# Altium PCB 2009_DFMUX_MEZZANINE_REV4_TIMEMAIL.PCBDOC (part 3 of 6)
Units mil, origin at the board's own origin, x right, y up, seen from the top; angles counter-clockwise.
Board outline 4922.86 x 3627.76 mil, 6 copper layers (Top Layer, Internal Plane 1, Mid-Layer 1, Internal Plane 2, Mid-Layer 2, Bottom Layer); 519 components, 606 nets, 2175 pads, 757 vias.
Unrouted connection lines stored in the file: 148.
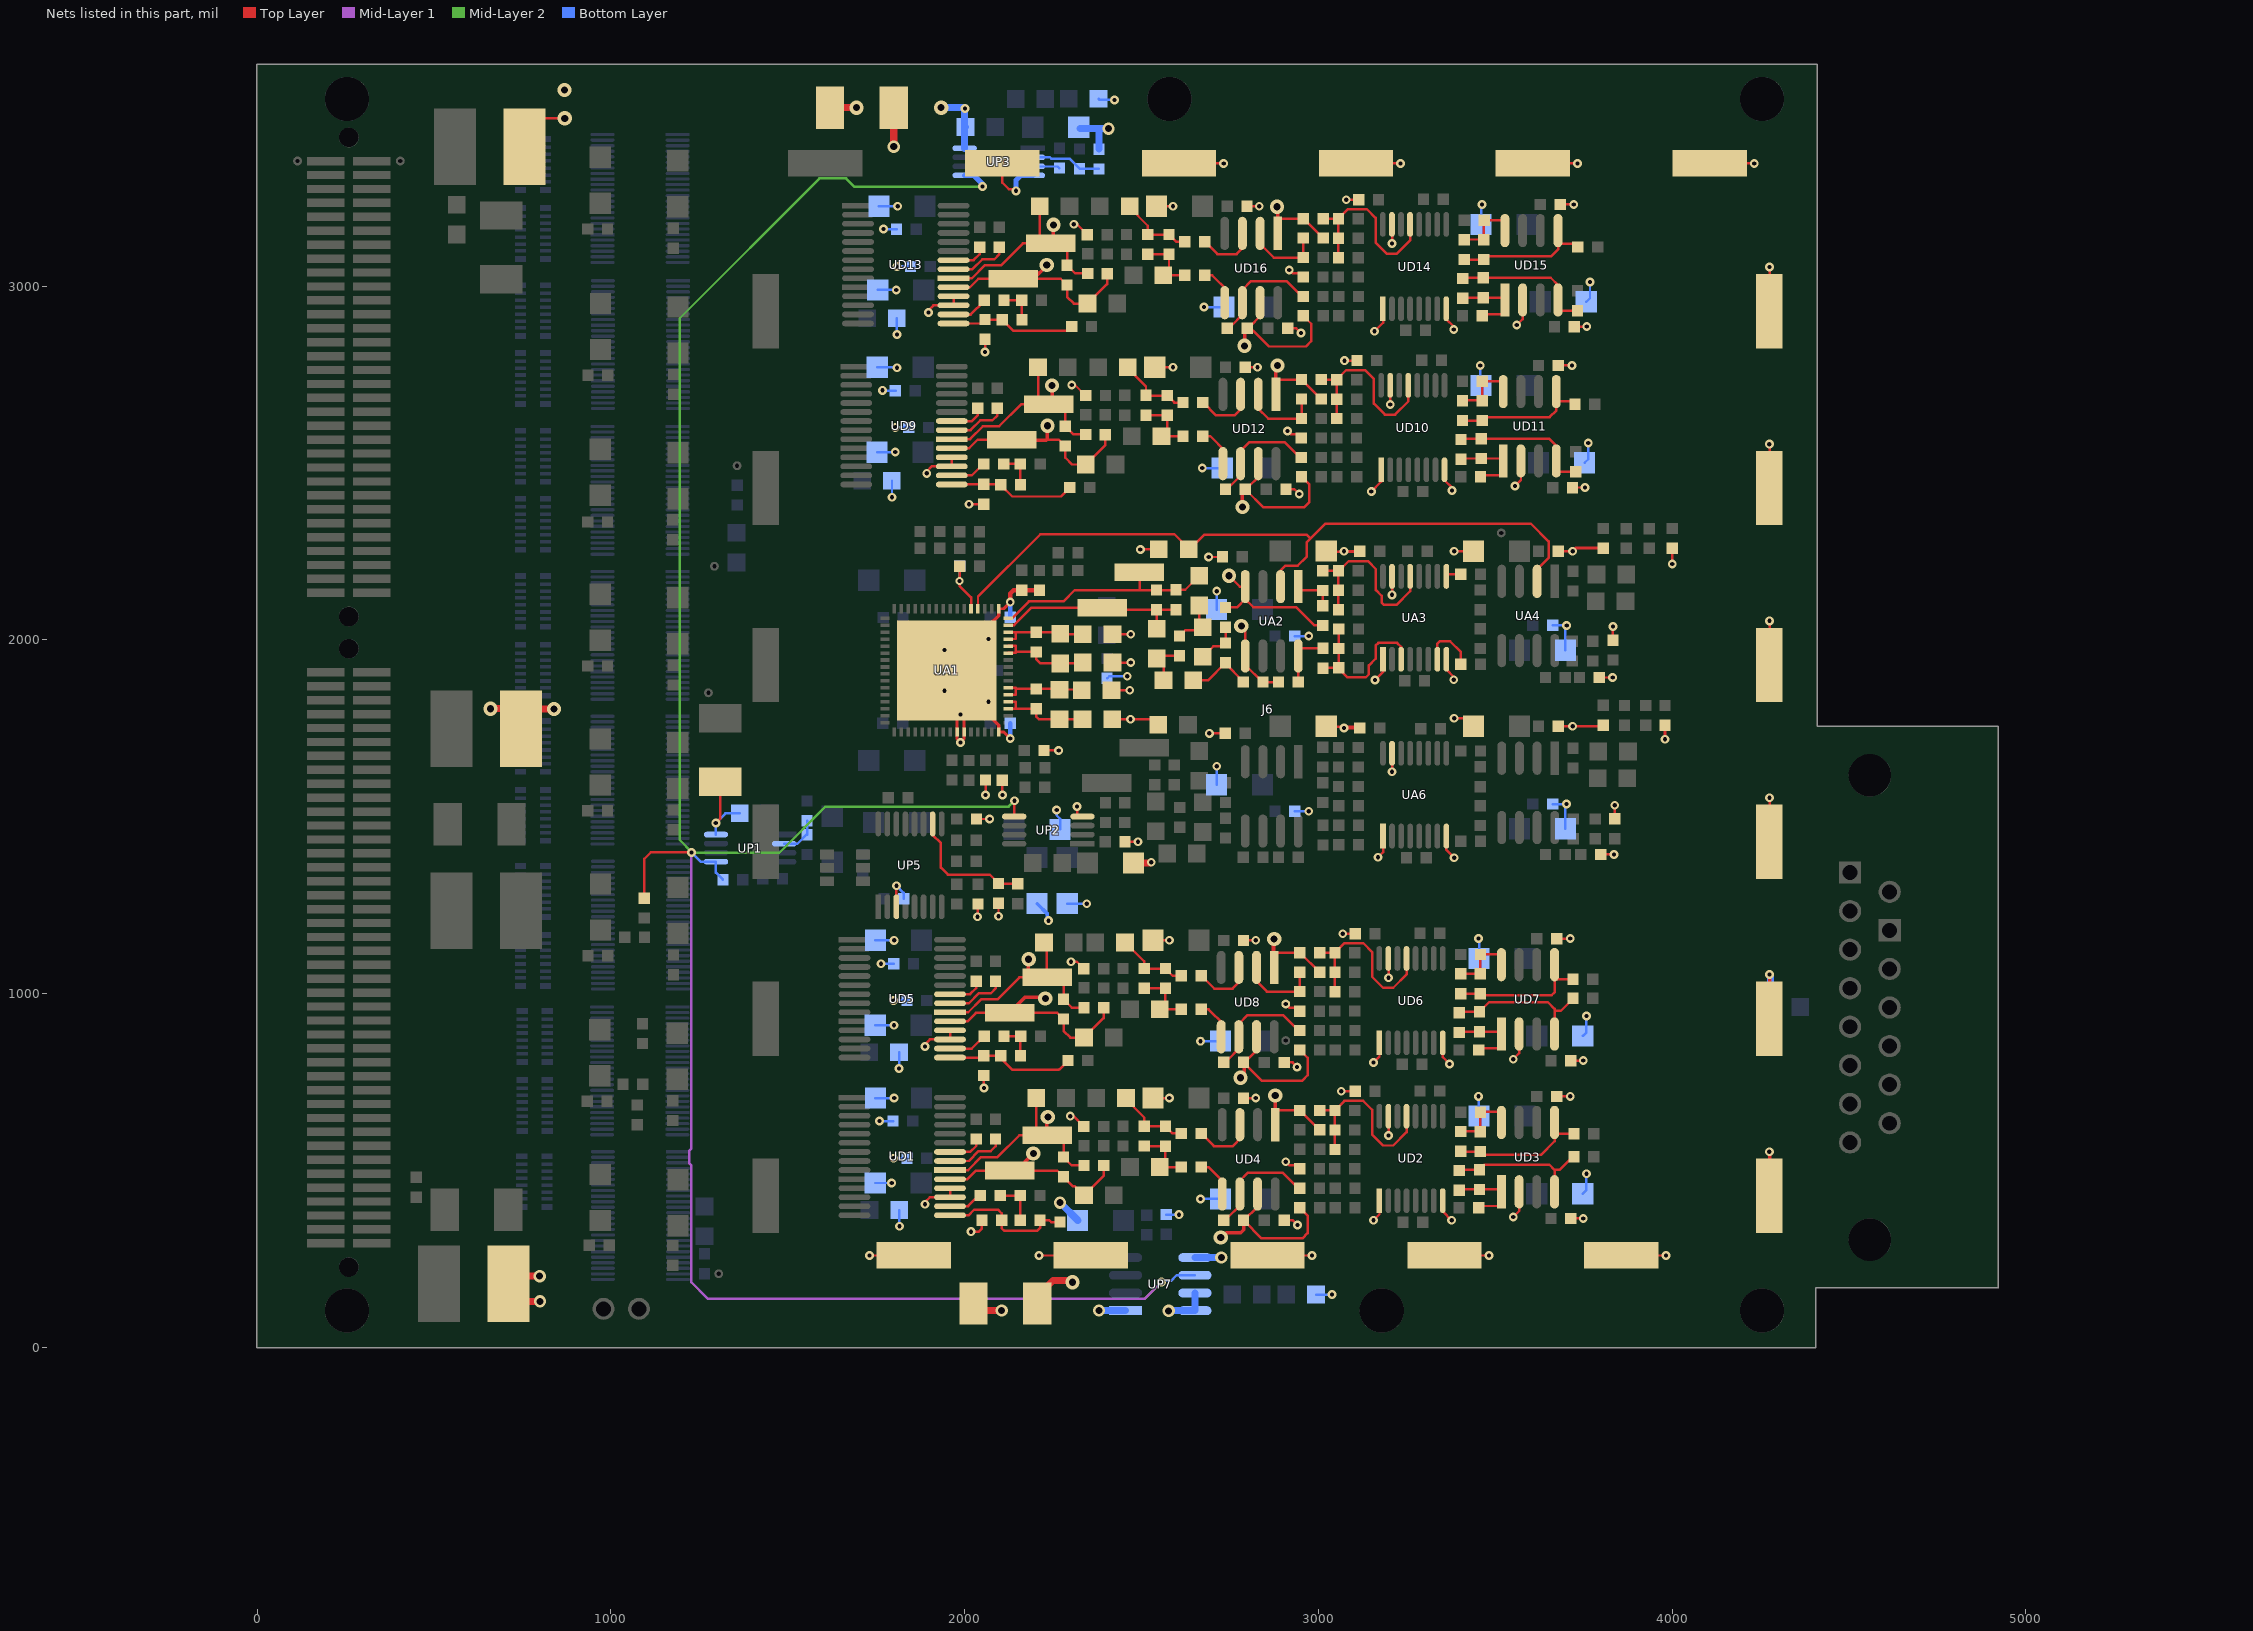
[diagram p7: the nets of this part, all layers, seen from the top]

## Via types
v1: diameter 25, hole 12, Top Layer to Bottom Layer, 692 vias
v2: diameter 40, hole 20, Top Layer to Bottom Layer, 39 vias
v3: diameter 35, hole 20, Top Layer to Bottom Layer, 23 vias
v4: diameter 22, hole 12, Top Layer to Bottom Layer, 3 vias

## Nets (pads, with @x,y where several pads share a name; then routed paths per layer and width w, separated by ;. In a path a pad name is that pad's centre, name@x,y a point inside that pad or via, vN(x,y) a via of type N, cw(c..) or ccw(c..) an arc to the next point about the centre after c; other vN are vias at no path point) (continued)
GND_SIGNAL: CA1.2 CA2.2 CA3.2 CA4.2 CA5.2 CA11.1 CA14.1 CA15.2 CA16.2 CA17.1 CA18.2 CA19.1 CA22.1 CA23.2 CA24.2 CA27.2 CA31.2 CA32.2 CA34.1 CA35.1 CA36.2 CA37.2 CA38.2 CA39.1 CA40.2 CA41.2 CA42.2 CA43.1 CD1.2 CD2.1 CD3.2 CD4.1 CD6.2 CD14.1 CD15.2 CD17.2 CD19.2 CD20.2 CD21.2 CD22.1 CD23.2 CD24.1 CD26.2 CD34.1 CD35.2 CD37.2 CD39.2 CD40.2 CD41.2 CD42.1 CD43.2 CD44.1 CD46.2 CD54.1 CD55.2 CD57.2 CD59.2 CD60.2 CD61.2 CD62.1 CD63.2 CD64.1 CD66.2 CD74.1 CD75.2 CD77.2 CD79.2 CD80.2 CD81.2 CD82.2 CD83.2 CD84.2 CD85.2 CD86.2 CD87.2 CD88.2 CD89.2 CD90.2 CD91.1 CD92.2 CD93.1 CD94.2 CD95.1 CD96.2 CD97.1 CD98.2 CP9.2 CP10.2 CP13.2 CP14.2 CP15.1 CP16.1 CP18.2 CP19.1 CP20.2 CP23.2 CP24.2 CP45.2 CP46.2 J6.1 J6.2 J6.3 J6.4 J6.5 J6.6 J6.7 J6.8 J6.9 J6.10 J6.11 J6.19 J6.20 J6.21 J6.22 J6.23 pad.1@1943.27,1855.87 pad.1@1943.27,1970.87 pad.1@1988.51,1788.64 pad.1@2067.25,1825.06 pad.1@2067.25,2002.22 pad.1@2666.63,865.43 pad.1@2907.63,970.43 pad.1@2939.63,792 RA8.1 RA43.1 RD11.2 RD15.2 RD41.2 RD45.2 RD71.2 RD75.2 RD101.2 RD105.2 RG1.1 RP10.2 RP12.2 RP15.2 RP17.2 RP19.2 RP23.2 RP24.1 RP26.1 RP28.1 RP29.1 RP34.1 RP36.2 RP37.2 RP38.2 RP39.2 RP40.2 RP55.1 RP58.1 UA1.17 UA1.58 UA1.59 UA1.64 UA1.65 UA3.1 UA3.8 UA3.15 UA6.1 UA6.8 UA6.15 UD1.17 UD1.18 UD2.1 UD2.8 UD2.15 UD3.2 UD5.17 UD5.18 UD6.1 UD6.8 UD6.15 UD7.2 UD9.17 UD9.18 UD10.1 UD10.8 UD10.15 UD11.2 UD13.17 UD13.18 UD14.1 UD14.8 UD14.15 UD15.2 UP2.4 UP3.4 UP5.3 UP7.5 | length 15519.3
  Top Layer w7: v1@1731.63,259 v1(1731.13,259.5) J6.11@1856.63,259.5 ; v1(1807.13,1304.87) UP5.3@1807.13,1245.8 ; v1(1887.63,404.43) 1887.83,404.63 1887.83,410.43 1901.63,424.23 1959.03,424.23 UD1.18@1959.03,449.83 ; v1(1887.63,850.43) 1887.83,850.63 1887.83,856.43 1901.63,870.23 ; UD5.18@1959.03,895.83 UD5.17@1959.03,870.23 ; UD9.18@1964.03,2515.83 1964.03,2490.23 1906.63,2490.23 1892.83,2476.43 v1@1892.83,2470.63 ; UD13.18@1969.03,2970.83 UD13.17@1969.03,2945.23 ; UA1.59@1999.48,1740.28 1999.8,1740.6 UA1.59@1999.8,1740.28 ; v1(2012.13,2383) CD57.2@2054.63,2383 ; v1(2017.63,327) 2040.13,327 2048.63,335.5 CD17.2@2048.63,359 ; RP23.2@2033.63,1493.37 v1(2070.63,1493.37) ; v1(2036.63,1217) 2036.63,1222 2037.63,1223 RP28.1@2037.63,1253.37 ; v1(2054.63,733) CD37.2@2054.63,768 ; v1(2057.63,2813.43) CD77.2@2057.63,2849 ; v1(2059.27,1560.87) CA31.2@2059.27,1603.37 ; J6.19@2106.63,3346.5 2106.63,3292 2124.63,3274 v1@2147.63,3274 ; v1(2106.77,1560.87) RA43.1@2106.77,1603.37 ; v1@2297.63,654.43 v1(2298.63,653.43) 2307.63,653.43 2336.63,624.43 RD11.2@2335.63,624.43 ; v1(2302.63,2720.43) 2303.63,2719.43 2312.63,2719.43 2341.63,2690.43 RD71.2@2340.63,2690.43 ; v2(2304.63,184) 2304.63,187 v2@2305.63,188 ; v1@2307.63,3175.43 v1(2308.63,3174.43) 2317.63,3174.43 2346.63,3145.43 RD101.2@2345.63,3145.43 ; v1(2317.63,1529) 2317.63,1505 UP2.4@2321.83,1500.8 ; RD41.2@2335.63,1070.43 2336.63,1070.43 2317.07,1090 ; CD2.1@2532.63,704.43 v1(2578.63,704.43) ; CD22.1@2532.63,1150.43 v1(2578.63,1150.43) ; CA35.1@2547.63,1760.43 2532.63,1775.43 v1(2468.63,1775.43) ; v1(2691.63,1735.43) CA24.2@2736.63,1735.43 ; v1@2731.63,3347 v1(2732.13,3346.5) ; CD40.2@2903.63,805.43 2927.2,805.43 2940.63,792 pad.1@2939.63,792 ; pad.1@2907.63,970.43 2917.63,960.43 RD45.2@2936.63,960.43 ; v1(2912.63,2590.43) 2922.63,2580.43 2941.63,2580.43 RD75.2@2951.63,2570.43 ; v1@2939.63,346 v1(2940.63,346) 2927.2,359.43 ; v1@2944.63,2412 v1(2945.63,2412) 2932.2,2425.43 ; RD15.2@2946.63,504.43 2936.63,514.43 2917.63,514.43 ; RD105.2@2956.63,3025.43 2946.63,3035.43 2927.63,3035.43 ; CA23.2@3022.63,1755.43 3022.63,1754.43 3116.63,1754.43 CD82.2@3116.63,1750.43 ; CA3.2@3022.63,2250.43 3022.63,2249.43 3116.63,2249.43 CD81.2@3116.63,2250.43 ; v1@3063.63,723 v1(3064.63,724) ; v1(3068.63,1169) CD26.2@3103.63,1169 ; v1(3149.63,2419) 3177.63,2447 UD10.1@3177.63,2480.43 ; v1@3158.63,2873 v1(3158.63,2872) 3182.63,2896 UD14.1@3182.63,2935.43 ; v1@3164.2,1881 v1@3168.63,1885.43 ; UA3.1@3182.63,1945.43 3182.63,1909 v1(3159.63,1886) ; v1(3198.22,598.85) UD2.15@3198.22,653.02 ; v1(3203.22,2664.85) UD10.15@3203.22,2719.02 ; v1@3208.05,1627.02 v1(3208.22,1627.02) UA6.15@3208.22,1679.68 ; UA3.15@3208.22,2179.68 v1(3208.22,2127.02) ; v1(3208.22,3119.85) UD14.15@3208.22,3174.02 ; UD2.8@3351.72,414.43 UD2.8@3351.72,383.92 ; UD6.8@3351.72,860.43 3351.72,819.92 v1(3370.63,801) ; UD14.8@3361.72,2935.43 3361.72,2905.87 3382.58,2885 v1(3382.58,2877) ; UA3.8@3361.77,1945.43 3361.77,1915.87 3382.63,1895 v1(3382.63,1887) ; v1(3377.58,2422) 3377.58,2430 UD10.8@3356.72,2450.87 ; v1(3383.63,1384) 3361.77,1405.87 ; v1(3383.63,2250.43) CA36.2@3437.63,2250.43 ; v1@3384.63,1779 v1(3383.63,1778) 3413.63,1778 CA40.2@3437.63,1755.43 ; v1@3481.63,260 v1(3482.13,259.5) ; v1(3550.63,368.43) 3567.63,385.43 UD3.2@3567.63,439.43 ; UD11.2@3572.63,2505.43 3572.63,2451.43 ; UD15.2@3577.63,2960.43 3577.63,2906.43 ; J6.22@3606.63,3346.5 v1(3732.13,3346.5) v1@3731.63,3347 ; CD85.2@3673.63,1155.43 v1(3711.63,1155.43) ; CD89.2@3683.63,3230.43 v1(3721.63,3230.43) ; RP29.1@3793.63,1893.37 v1(3831.63,1893.37) ; RP34.1@3797.63,1393.37 v1(3835.63,1393.37) v1@3834.63,1394.37 ; RP58.1@3805,1759 3801.43,1755.43 v1(3718.63,1755.43) ; CP18.2@3832.63,1999.37 v1(3832.63,2037.37) ; CP20.2@3837.63,1494.37 v1(3837.63,1532.37) ; J6.23@4106.63,3346.5 v1(4232.13,3346.5) v1@4231.63,3347 ; v1(4274.63,553) v1@4275.13,553.5 ; v1@4274.63,1553 v1(4275.13,1553.5) J6.4@4275.13,1428 ; v1@4274.63,2053 v1(4275.13,2053.5) J6.3@4275.13,1928 ; J6.2@4275.13,2428 v1@4275.13,2553.5 ; UP5.3@1807.13,1245.8 1807.63,1245.3 UP5.3@1807.13,1245.8 ; v1@1892.83,2470.63 v1(1892.63,2470.43) v1@1892.83,2470.63 ; v1@1897.83,2925.63 v1(1897.63,2925.43) v1@1897.83,2925.63 ; v1@1897.83,2925.63 1897.83,2931.43 1911.63,2945.23 ; 1901.63,870.23 UD5.17@1959.03,870.23 ; 1901.63,870.23 UD5.17@1959.03,870.23 ; 1911.63,2945.23 UD13.17@1969.03,2945.23 ; 1911.63,2945.23 UD13.17@1969.03,2945.23 ; CA27.2@2224.63,1687.37 v1(2265.63,1687.37) ; CA27.2@2224.63,1687.37 v1(2265.63,1687.37) ; CA27.2@2224.63,1687.37 v1(2265.63,1687.37) ; 2317.07,1090 v1(2300.63,1090) 2317.07,1090 ; UP2.4@2321.83,1500.8 2332.63,1500.8 UP2.4@2321.83,1500.8 ; v1(2468.63,1775.43) 2416.63,1775.43 v1(2468.63,1775.43) ; v1(2732.13,3346.5) 2606.63,3346.5 v1(2732.13,3346.5) ; CD1.2@2788.63,704.43 v1(2822.63,704.43) ; CD1.2@2788.63,704.43 v1(2822.63,704.43) ; CD1.2@2788.63,704.43 v1(2822.63,704.43) ; 2917.63,514.43 v1(2907.63,524.43) 2917.63,514.43 ; 2927.2,359.43 2903.63,359.43 2927.2,359.43 ; 2927.63,3035.43 v1(2917.63,3045.43) 2927.63,3035.43 ; 2932.2,2425.43 2908.63,2425.43 2932.2,2425.43 ; RD45.2@2936.63,960.43 2946.63,950.43 RD45.2@2936.63,960.43 ; 2937.2,2880.43 v1(2950.63,2867) ; 2937.2,2880.43 2913.63,2880.43 2937.2,2880.43 ; v1(2950.63,2867) 2949.63,2867 v1(2950.63,2867) ; v1(2982.13,259.5) 2981.63,260 v1(2982.13,259.5) ; v1(2982.13,259.5) 2856.63,259.5 v1(2982.13,259.5) ; v1(3064.63,724) 3103.63,724 v1(3064.63,724) ; CD82.2@3116.63,1750.43 v1(3072.63,1750.43) CD82.2@3116.63,1750.43 ; CD81.2@3116.63,2250.43 v1(3072.63,2250.43) CD81.2@3116.63,2250.43 ; v1(3159.63,1886) 3154.63,1881 v1(3159.63,1886) ; 3172.63,376 v1(3155.63,359) 3172.63,376 ; 3172.63,376 3172.63,414.43 3172.63,376 ; 3172.63,822 3172.63,860.43 3172.63,822 ; 3172.63,822 v1(3155.63,805) 3172.63,822 ; 3182.63,1399.43 3182.63,1445.43 3182.63,1399.43 ; 3182.63,1399.43 v1(3168.63,1385.43) 3182.63,1399.43 ; v1(3208.22,2127.02) 3208.05,2127.02 v1(3208.22,2127.02) ; v1(3232.13,3346.5) 3231.63,3347 v1(3232.13,3346.5) ; v1(3232.13,3346.5) 3106.63,3346.5 v1(3232.13,3346.5) ; UD2.8@3351.72,383.92 v1(3376.63,359) UD2.8@3351.72,383.92 ; UD10.8@3356.72,2450.87 3356.72,2480.43 UD10.8@3356.72,2450.87 ; 3361.77,1405.87 3361.77,1445.43 3361.77,1405.87 ; v1(3482.13,259.5) 3356.63,259.5 v1(3482.13,259.5) ; 3567.63,831.43 v1(3550.63,814.43) 3567.63,831.43 ; 3567.63,831.43 3567.63,885.43 3567.63,831.43 ; 3572.63,2451.43 v1(3555.63,2434.43) 3572.63,2451.43 ; 3577.63,2906.43 v1(3560.63,2889.43) 3577.63,2906.43 ; v1(3718.63,1755.43) 3678.63,1755.43 v1(3718.63,1755.43) ; v1(3831.63,1893.37) 3830.63,1894.37 v1(3831.63,1893.37) ; v1(3832.63,2037.37) 3831.63,2036.37 v1(3832.63,2037.37) ; v1(3837.63,1532.37) 3836.63,1531.37 v1(3837.63,1532.37) ; v1(3982.13,259.5) 3981.63,260 v1(3982.13,259.5) ; v1(3982.13,259.5) 3856.63,259.5 v1(3982.13,259.5) ; v1@4275.13,2553.5 v1(4274.63,2553) v1@4275.13,2553.5 ; v1(4275.13,3053.5) 4274.63,3053 v1(4275.13,3053.5) ; v1(4275.13,3053.5) 4275.13,2928 v1(4275.13,3053.5) ; v1(2095.63,1218.37) 2095.63,1255.37 v1(2095.63,1218.37) ; v1(2210.13,259.5) 2356.63,259.5 v1(2210.13,259.5) ; CA19.1@2414.63,1857.43 v1(2466.63,1857.43) CA19.1@2414.63,1857.43 ; CA14.1@2417.63,1935.43 v1(2469.63,1935.43) CA14.1@2417.63,1935.43 ; CA11.1@2417.63,2015.43 v1(2469.63,2015.43) CA11.1@2417.63,2015.43 ; RP10.2@2453.63,1429 v1(2489.63,1429) RP10.2@2453.63,1429 ; v1(2496.63,2255.43) 2548.63,2255.43 v1(2496.63,2255.43) ; v1@2525.63,1369 v1(2527.63,1371) v1@2525.63,1369 ; CD42.1@2537.63,2770.43 v1(2588.63,2770.43) CD42.1@2537.63,2770.43 ; CD62.1@2542.63,3225.43 v1(2588.63,3225.43) CD62.1@2542.63,3225.43 ; v1(2689.63,2234) 2728.63,2234 v1(2689.63,2234) ; CD21.2@2788.63,1150.43 v1(2822.63,1150.43) CD21.2@2788.63,1150.43 ; CD41.2@2793.63,2770.43 v1(2827.63,2770.43) CD41.2@2793.63,2770.43 ; CD61.2@2798.63,3225.43 v1(2832.63,3225.43) CD61.2@2798.63,3225.43 ; v1(3073.63,2789) 3108.63,2789 v1(3073.63,2789) ; v1(3078.63,3244) 3113.63,3244 v1(3078.63,3244) ; v1(3198.22,1044.85) 3198.22,1099.02 v1(3198.22,1044.85) ; CD83.2@3673.63,709.43 v1(3711.63,709.43) CD83.2@3673.63,709.43 ; CA37.2@3678.63,2250.43 v1(3718.63,2250.43) CA37.2@3678.63,2250.43 ; CD87.2@3678.63,2775.43 v1(3716.63,2775.43) CD87.2@3678.63,2775.43 ; CD84.2@3713.63,364.43 v1(3748.63,364.43) CD84.2@3713.63,364.43 ; CD86.2@3713.63,810.43 v1(3748.63,810.43) CD86.2@3713.63,810.43 ; CD88.2@3718.63,2430.43 v1(3753.63,2430.43) CD88.2@3718.63,2430.43 ; CD90.2@3723.63,2885.43 v1(3758.63,2885.43) CD90.2@3723.63,2885.43 ; v1@4274.63,1053 v1(4275.13,1053.5) v1@4274.63,1053
  Top Layer w8: UA1.65@1978.66,1787.76 1978.66,1739.43 1978.66,1719.74 v1(1988.51,1709.9) 1998.35,1719.74 1998.35,1739.43 UA1.65@1998.35,1786.79 ; UA1.64@2096.77,1739.43 2110.45,1739.43 v1(2129,1720.87) ; UA1.17@2096.77,2087.85 2110.45,2087.85 v1(2129,2106.41) ; v1(3718.63,2250.43) 3727.2,2259 RP55.1@3805,2259 ; v1(3980,1719) 3980,1758 v1(3980,1719) ; v1(4000,2214) 4000,2258 v1(4000,2214)
  Top Layer w10: UA1.65@2071.77,2043.37 2096.77,2068.37 UA1.17@2096.77,2087.85 ; UA1.65@2074.27,1780.87 2096.77,1758.36 UA1.64@2096.77,1739.43 ; v1(2145,3269) v1@2147.63,3274 ; J6.6@4275.13,428 4275.13,553.5 J6.6@4275.13,428 ; J6.5@4275.13,928 v1(4275.13,1053.5) J6.5@4275.13,928
  Top Layer w12: v1(2129,2106.41) 2129,2130.6 2138.27,2139.87 2161.77,2139.87 RA8.1@2211.77,2139.87
  Top Layer w20: v3(1799.63,3394) CP13.2@1799.63,3504 ; CP15.1@2204.63,124 2204.63,143.63 2250,189 2304.63,189 v2@2305.63,188 ; CP10.2@2477.63,1369 v1@2525.63,1369 ; CP10.2@2477.63,1369 v1@2525.63,1369 ; CP10.2@2477.63,1369 v1@2525.63,1369
  Bottom Layer w7: CD34.1@1747.63,910.43 v1(1800.57,910.43) ; v1@1760.63,640.37 v1(1759.63,639.37) CD4.1@1797.63,639.37 ; v1(1763.63,1084) CD24.1@1799.63,1084 ; v1(1794.63,2403) RP37.2@1794.63,2449 ; v1(1798.63,534.43) CD15.2@1836.63,534.43 ; v1(1798.63,980.43) CD35.2@1836.63,980.43 ; v1(1800.63,1150.37) v1@1800.57,1150.43 ; v1@1801.07,704 v1(1800.63,704.43) ; v1(1803.63,2600.43) CD55.2@1841.63,2600.43 ; CD44.1@1804.63,2704 v1@1766.63,2704 ; v1(1807.13,1304.87) 1827.63,1284.37 CP19.1@1827.63,1268.37 ; v1(1808.63,3055.43) CD75.2@1846.63,3055.43 ; v1(1810.63,3225.37) v1@1810.57,3225.43 ; v1(1814.63,788) RP39.2@1814.63,834 ; CP23.2@2270,1464 2270,1494 2260,1504 ; CP24.2@2290,1254 v1(2345,1254) ; CP14.2@2322.63,3449 CP14.2@2326.63,3445 ; RP17.2@2378.63,3529 2381.63,3526 v1(2423.63,3526) ; v1(2666.63,419.43) CD19.2@2722.63,419.43 ; pad.1@2666.63,865.43 CD39.2@2722.63,865.43 ; v1(2671.63,2485.43) CD59.2@2727.63,2485.43 ; CA34.1@2712.63,1590.43 v1(2712.63,1642.43) ; CA17.1@2712.63,2085.43 v1(2712.63,2137.43) ; CA32.2@2933.63,1515.43 v1(2972.63,1515.43) ; CA16.2@2933.63,2010.43 v1(2972.63,2010.43) ; RP19.2@2993.63,149 v1(3038.63,149) ; v1(3452.63,709.43) 3452.63,656 CD91.1@3454.63,654 ; v1(3452.63,1155.43) 3454.63,1153.43 CD93.1@3454.63,1099 ; CD95.1@3457.63,2721 v1(3457.63,2775.43) ; CD95.1@3459.63,2719 CD95.1@3461.63,2717 ; CD97.1@3459.63,3174 3459.63,3227.43 v1(3462.63,3230.43) ; CA38.2@3662.63,2040.43 3693.63,2040.43 v1@3697.63,2036.43 ; CA43.1@3697.63,1465.43 3697.63,1531.43 v1@3701.63,1535.43 ; CA39.1@3697.63,1970.43 v1@3697.63,2036.43 ; CD92.2@3747.63,434.43 3757.63,444.43 v1(3757.63,490.43) ; CD96.2@3752.63,2500.43 3762.63,2510.43 v1(3762.63,2556.43) ; v1(4274.63,553) v1@4278,556.37 ; v1@4274.63,1053 4271,1053 v1@4278,1046 ; v1@4275,1054 v1@4278,1051 ; v1@1766.63,2704 v1(1767.63,2705) v1@1766.63,2704 ; v1@1769.63,3160.37 v1(1770.63,3161.37) v1@1769.63,3160.37 ; v1@1769.63,3160.37 1807.63,3160.37 v1@1769.63,3160.37 ; v1(1800.57,910.43) 1800.63,910.37 v1(1800.57,910.43) ; v1@1800.57,1150.43 1747.63,1150.43 v1@1800.57,1150.43 ; v1(1800.63,704.43) 1747.63,704.43 v1(1800.63,704.43) ; v1@1806.2,2989 v1(1806.63,2988.57) v1@1806.2,2989 ; v1@1806.2,2989 1754.63,2989 v1@1806.2,2989 ; v1@1807.2,2770.43 v1(1808.63,2769) v1@1807.2,2770.43 ; v1@1807.2,2770.43 1752.63,2770.43 v1@1807.2,2770.43 ; v1@1810.57,3225.43 1757.63,3225.43 v1@1810.57,3225.43 ; 2260,1504 v1(2260,1519) 2260,1504 ; RP12.2@2408.63,1897 v1(2459.63,1897) RP12.2@2408.63,1897 ; RP12.2@2408.63,1897 2402.63,1891 RP12.2@2408.63,1897 ; v1@3697.63,2036.43 v1(3701.63,2040.43) v1@3697.63,2036.43 ; v1@3701.63,1535.43 3662.63,1535.43 v1@3701.63,1535.43 ; CD94.2@3757.63,890.43 v1(3757.63,936.43) CD94.2@3757.63,890.43 ; CD94.2@3757.63,890.43 3747.63,880.43 CD94.2@3757.63,890.43 ; CD98.2@3767.63,2965.43 v1(3767.63,3011.43) CD98.2@3767.63,2965.43 ; CD98.2@3767.63,2965.43 3757.63,2955.43 CD98.2@3767.63,2965.43 ; CD14.1@1747.63,464.43 v1(1793.63,464.43) CD14.1@1747.63,464.43 ; CD54.1@1752.63,2530.43 v1(1803.63,2530.43) CD54.1@1752.63,2530.43 ; v1(1808.63,2863) 1808.63,2909 v1(1808.63,2863) ; v1(1815.63,342) 1815.63,388 v1(1815.63,342) ; RP24.1@2569.63,375 v1(2605.63,375) RP24.1@2569.63,375 ; v1(2676.63,2940.43) 2732.63,2940.43 v1(2676.63,2940.43)
  Bottom Layer w10: v1(2237,1206) 2234,1203 CP9.2@2234,1225 ; v1@4274.63,1053 4274.63,1053.63 v1@4275,1054 ; CP9.2@2234,1225 2205,1254 CP9.2@2234,1225
  Bottom Layer w12: v1(2129,1720.87) CA18.2@2129,1763.91 ; CA4.2@2129,2063.37 v1(2129,2106.41)
  Bottom Layer w15: 2145,3299 v1(2145,3269) 2145,3299 ; 2145,3299 2158.2,3312.2 ; 2158.2,3312.2 2192.63,3312.2 2158.2,3312.2
  Bottom Layer w20: pad.1@1943.27,1855.87 RP38.2@1943.27,1913.37 ; pad.1@1943.27,1970.87 RP38.2@1943.27,1913.37 ; CA15.2@2035.77,1913.37 RP38.2@1943.27,1913.37 ; CP14.2@2326.63,3445 2379.63,3445 ; v3(2406.63,3445) 2379.63,3445 ; UP7.5@2650.63,254 v3(2725.63,254) ; v1@4278,1051 v1@4278,1046 ; 2379.63,3445 2379.63,3387 2379.63,3445 ; v1@4278,1046 4278,962 v1@4278,1046 ; v3(2269.63,409) 2319.63,359 v3(2269.63,409)
  other v1: 3701.13,1535.43
N02025: CD68.2 UD13.22 | length 99.7
  Top Layer w7: UD13.22@1969.03,3073.23 2025.43,3073.23 2042.63,3090.43 CD68.2@2042.63,3109.43
N02025_5443: CD48.2 UD9.22 | length 99.7
  Top Layer w7: UD9.22@1964.03,2618.23 2020.43,2618.23 2037.63,2635.43 CD48.2@2037.63,2654.43
N02025_5891: CD28.2 UD5.22 | length 99.7
  Top Layer w7: UD5.22@1959.03,998.23 2015.43,998.23 2032.63,1015.43 CD28.2@2032.63,1034.43
N02025_6339: CD8.2 UD1.22 | length 99.7
  Top Layer w7: UD1.22@1959.03,552.23 2015.43,552.23 2032.63,569.43 CD8.2@2032.63,588.43
N02076: CD9.2 UD1.21 | length 165.9
  Top Layer w7: UD1.21@1959.03,526.63 2011.83,526.63 2039.63,554.43 2073.63,554.43 2087.63,568.43 CD9.2@2087.63,588.43
N02076_2990: CD69.2 UD13.21 | length 165.9
  Top Layer w7: UD13.21@1969.03,3047.63 2021.83,3047.63 2049.63,3075.43 2083.63,3075.43 2097.63,3089.43 CD69.2@2097.63,3109.43
N02076_5385: CD49.2 UD9.21 | length 165.9
  Top Layer w7: UD9.21@1964.03,2592.63 2016.83,2592.63 2044.63,2620.43 2078.63,2620.43 2092.63,2634.43 CD49.2@2092.63,2654.43
N02076_5833: CD29.2 UD5.21 | length 165.9
  Top Layer w7: UD5.21@1959.03,972.63 2011.83,972.63 2039.63,1000.43 2073.63,1000.43 2087.63,1014.43 CD29.2@2087.63,1034.43
N03097: CD77.1 RD118.2 RD120.1 UD13.15 | length 355.7
  Top Layer w7: UD13.15@1969.03,2894.03 2046.67,2894.03 2057.63,2905 2105.63,2905 2136.63,2874 2291.2,2874 RD120.1@2302.63,2885.43
N03097_5373: CD57.1 RD88.2 RD90.1 UD9.15 | length 358.2
  Top Layer w7: UD9.15@1964.07,2439 2054.63,2439 2100.63,2439 2101.63,2438 2134.63,2405 2272.2,2405 RD90.1@2297.63,2430.43
N03097_5821: CD37.1 RD58.2 RD60.1 UD5.15 | length 369.6
  Top Layer w7: UD5.15@1959.03,819.03 1962.63,815.43 1965.2,818 2048.63,818 2054.63,824 2101.63,824 2101.63,818 2135.63,784 2266.07,784 2267.63,785.43 RD60.1@2292.63,810.43
N03097_6269: CD17.1 RD28.2 RD30.1 UD1.15 | length 394.1
  Top Layer w7: UD1.15@1959.03,373.03 2011.17,373.03 2027.13,389 2094.63,389 2104.63,379 2104.63,359 2104.63,336.5 2112.13,329 2204.63,329 2213.13,337.5 2213.13,359 2239.63,359 2244.63,354 RD30.1@2269.63,354
N04051: RD2SET4.1 UD13.16 | length 105.6
  Top Layer w7: UD13.16@1969.03,2919.63 1970.03,2918.43 1970.6,2919 2016.63,2919 2055.63,2958 RD2SET4.1@2055.63,2960
N04051_5452: RD2SET3.1 UD9.16 | length 104
  Top Layer w7: UD9.16@1964.03,2464.63 1964.4,2465 2020.63,2465 2052.63,2497 RD2SET3.1@2054.63,2497
N04051_5900: RD2SET2.1 UD5.16 | length 111.9
  Top Layer w7: UD5.16@1959.03,844.63 1960.03,843.43 1960.6,844 2019.63,844 2054.63,879 RD2SET2.1@2055.63,879
N04051_6348: RD2SET1.1 UD1.16 | length 104
  Top Layer w7: UD1.16@1959.03,398.63 1959.4,399 2009.63,399 2029.63,419 2044.63,419 RD2SET1.1@2044.63,429
N04200: RD2SET4.2 RD110.1 RD118.1 | length 105
  Top Layer w7: RD2SET4.2@2111.63,2960 2161.63,2960 RD118.1@2161.63,2905
N04200_5371: RD2SET3.2 RD80.1 RD88.1 | length 107
  Top Layer w7: RD2SET3.2@2109.63,2497 2110.63,2497 2157.63,2497 RD88.1@2157.63,2438
N04200_5819: RD2SET2.2 RD50.1 RD58.1 | length 103.4
  Top Layer w7: RD2SET2.2@2110.63,879 2111.63,879 2158.63,879 2157.63,878 RD58.1@2157.63,824
N04200_6267: RD2SET1.2 RD20.1 RD28.1 | length 126.5
  Top Layer w7: RD2SET1.2@2100.63,429 2157.13,429 RD28.1@2157.13,359
N07701: CD70.1 JD4.2 LD13.1 RD100.1 UD13.20 | length 655.6
  Top Layer w7: UD13.20@1969.03,3022.03 2020.23,3022.03 2056.63,3058.43 2102.63,3058.43 2164.63,3120.43 JD4.2@2221.63,3120.43 ; LD13.1@2212.63,3225.43 2212.63,3129.43 JD4.2@2221.63,3120.43 ; RD100.1@2347.63,3035.43 2312.63,3035.43 2289.63,3058.43 2289.63,3120.43 2242.63,3120.43 JD4.2@2221.63,3120.43
  Top Layer w10: JD4.2@2242.63,3120.43 2251,3128.8 v2(2251,3173)
N07701_5419: CD50.1 JD3.2 LD9.1 RD70.1 UD9.20 | length 662.2
  Top Layer w7: UD9.20@1964.03,2567.03 2015.23,2567.03 2051.63,2603.43 2097.63,2603.43 2159.63,2665.43 JD3.2@2216.63,2665.43 ; LD9.1@2207.63,2770.43 2207.63,2674.43 JD3.2@2216.63,2665.43 ; JD3.2@2237.63,2665.43 JD3.2@2216.63,2665.43 ; JD3.2@2246.43,2665.43 2284.63,2665.43 2284.63,2603.43 2307.63,2580.43 RD70.1@2342.63,2580.43
  Top Layer w10: v2(2247,2719) 2247,2666 JD3.2@2246.43,2665.43 ; JD3.2@2246.43,2665.43 2237.63,2665.43 JD3.2@2246.43,2665.43
N07701_5867: CD30.1 JD2.2 LD5.1 RD40.1 UD5.20 | length 654.5
  Top Layer w7: UD5.20@1959.03,947.03 2010.23,947.03 2046.63,983.43 2092.63,983.43 2154.63,1045.43 JD2.2@2203.57,1045.43 ; LD5.1@2224.63,1144 2232.63,1136 2232.63,1045.43 2279.63,1045.43 2279.63,983.43 2302.63,960.43 RD40.1@2337.63,960.43
  Top Layer w10: v2(2181,1097) 2180,1096 2180,1069 2203.57,1045.43 JD2.2@2232.63,1045.43
N07701_6315: CD10.1 JD1.2 LD1.1 RD10.1 UD1.20 | length 652.2
  Top Layer w7: UD1.20@1959.03,501.03 2010.23,501.03 2046.63,537.43 2092.63,537.43 2154.63,599.43 JD1.2@2211.63,599.43 ; LD1.1@2202.63,704.43 2202.63,608.43 JD1.2@2211.63,599.43 ; RD10.1@2337.63,514.43 2302.63,514.43 2279.63,537.43 2279.63,599.43 2232.63,599.43 JD1.2@2211.63,599.43
  Top Layer w10: JD1.2@2232.63,599.43 2232.63,648.63 v2(2235,651)
N07959: CD10.2 JD1.1 LD3.1 RD16.2 UD1.19 | length 618.4
  Top Layer w7: UD1.19@1959.03,475.43 2007.63,475.43 2031.63,499.43 JD1.1@2127.63,499.43 ; RD16.2@2392.63,513.43 2392.63,484.43 2337.63,429.43 2311.63,455 2306.2,455 2279.63,481.1 2279.63,481.43 2261.63,499.43 JD1.1@2145.43,499.43 ; JD1.1@2127.63,499.43 JD1.1@2145.43,499.43 ; JD1.1@2127.63,499.43 JD1.1@2145.43,499.43
  Top Layer w10: JD1.1@2140,494 2145.43,499.43 v2(2194,548)
N07959_3010: CD70.2 JD4.1 LD15.1 RD106.2 UD13.19 | length 599.2
  Top Layer w7: UD13.19@1969.03,2996.43 2015.07,2996.43 2039.07,3020.43 2137.63,3020.43 2194.43,3020.43 2271.63,3020.43 2289.63,3002.43 2289.63,2969.43 2308.63,2950.43 2347.63,2950.43 2402.63,3005.43 RD106.2@2402.63,3034.43
  Top Layer w10: JD4.1@2194.43,3020.43 2233,3059 v2(2232,3059)
N07959_5408: CD50.2 JD3.1 LD11.1 RD76.2 UD9.19 | length 735.1
  Top Layer w7: UD9.19@1964.03,2541.43 2012.63,2541.43 2036.63,2565.43 JD3.1@2132.63,2565.43 ; RD76.2@2397.63,2579.43 2397.63,2550.43 2342.63,2495.43 2303.63,2495.43 2284.63,2514.43 2284.63,2547.43 2266.63,2565.43 2231.43,2565.43 ; JD3.1@2132.63,2565.43 2231.43,2565.43 ; JD3.1@2132.63,2565.43 2231.43,2565.43
  Top Layer w10: JD3.1@2180,2564 2230,2564 2231.43,2565.43 2234,2568 v2(2234,2605)
N07959_5856: CD30.2 JD2.1 LD7.1 RD46.2 UD5.19 | length 664
  Top Layer w7: UD5.19@1959.03,921.43 2007.63,921.43 2031.63,945.43 2127.63,945.43 2261.63,945.43 2279.63,927.43 2279.63,894.43 2298.63,875.43 2337.63,875.43 2392.63,930.43 RD46.2@2392.63,959.43
  Top Layer w10: JD2.1@2127.63,945.43 2127.63,946.63 2170,989 2225,989 v2(2228,986)
N08417: CD11.1 LD2.2 RD9.1 RD14.1 | length 214.4
  Top Layer w7: LD2.2@2456.63,704.43 2456.63,700.43 2507.63,649.43 2507.63,624.43 2567.63,624.43 2587.63,604.43 RD9.1@2612.63,604.43
N08417_3009: CD71.1 LD14.2 RD99.1 RD104.1 | length 214.4
  Top Layer w7: LD14.2@2466.63,3225.43 2466.63,3221.43 2517.63,3170.43 2517.63,3145.43 2577.63,3145.43 2597.63,3125.43 RD99.1@2622.63,3125.43
N08417_5407: CD51.1 LD10.2 RD69.1 RD74.1 | length 214.4
  Top Layer w7: LD10.2@2461.63,2770.43 2461.63,2766.43 2512.63,2715.43 2512.63,2690.43 2572.63,2690.43 2592.63,2670.43 RD69.1@2617.63,2670.43
N08417_5855: CD31.1 LD6.2 RD39.1 RD44.1 | length 222.1
  Top Layer w7: LD6.2@2453.63,1144 2453.63,1147.43 2456.63,1150.43 2456.63,1142 2507.63,1091 2507.63,1070.43 2567.63,1070.43 2587.63,1050.43 RD39.1@2612.63,1050.43
N08612: CA8.1 LA2.2 RA19.1 | length 126.2
  Top Layer w7: LA2.2@2672.63,1951.43 2702.63,1981.43 2728.63,1981.43 2737.63,1990.43 RA19.1@2737.63,2035.43
N08712: CA8.2 LA4.2 RA21.1 | length 186
  Top Layer w7: LA4.2@2646.63,1885.43 2687.63,1885.43 2736.63,1934.43 2737.63,1934.43 2737.63,1932.43 2787.63,1882.43 RA21.1@2787.63,1880.43
N08812: CA10.2 LA3.2 LA4.1 | length 137.6
  Top Layer w7: LA4.1@2562.63,1885.43 2562.63,1926.43 2542.63,1946.43 2550.63,1954.43 CA10.2@2607.63,1954.43
N09123: CA10.1 LA1.2 LA2.1 | length 140.5
  Top Layer w7: CA10.1@2607.63,2010.43 2623.63,2026.43 2663.63,2026.43 2672.63,2035.43 2662.63,2045.43 LA1.2@2662.63,2096.43
N09233: CA9.2 JA1.2 LA3.1 RA20.1 UA1.15 | length 550.1
  Top Layer w7: UA1.15@2123.35,2041.59 2139.99,2041.59 2189.27,2090.87 2389.27,2090.87 2408.63,2084.43 CA9.2@2542.63,2084.43 ; LA3.1@2542.63,2030.43 CA9.2@2542.63,2084.43 ; RA20.1@2597.63,2085.43 2596.63,2084.43 CA9.2@2542.63,2084.43
N09341: CA9.1 JA1.1 LA1.1 RA20.2 UA1.16 | length 639.1
  Top Layer w7: UA1.16@2123.35,2061.28 2134.68,2061.28 2181.77,2108.37 2279.27,2108.37 2311.34,2140.43 2494.27,2140.43 ; JA1.1@2494.27,2190.87 2494.27,2140.43 ; LA1.1@2662.63,2180.43 2623.63,2141.43 2597.63,2141.43 2596.63,2140.43 2542.63,2140.43 2494.27,2140.43
N09563: CD71.2 LD16.2 RD104.2 RD109.1 | length 186.6
  Top Layer w7: CD71.2@2517.63,3089.43 2577.63,3089.43 LD16.2@2577.63,3046.43 ; LD16.2@2561.63,3030.43 LD16.2@2577.63,3046.43 ; RD109.1@2622.63,3030.43 2577.63,3030.43 LD16.2@2577.63,3046.43
N09563_5444: CD51.2 LD12.2 RD74.2 RD79.1 | length 186.6
  Top Layer w7: CD51.2@2512.63,2634.43 2572.63,2634.43 LD12.2@2572.63,2591.43 ; LD12.2@2556.63,2575.43 LD12.2@2572.63,2591.43 ; RD79.1@2617.63,2575.43 2572.63,2575.43 LD12.2@2572.63,2591.43
N09563_5892: CD31.2 LD8.2 RD44.2 RD49.1 | length 186.6
  Top Layer w7: CD31.2@2507.63,1014.43 2567.63,1014.43 LD8.2@2567.63,971.43 ; LD8.2@2551.63,955.43 LD8.2@2567.63,971.43 ; RD49.1@2612.63,955.43 2567.63,955.43 LD8.2@2567.63,971.43
N09563_6340: CD11.2 LD4.2 RD14.2 RD19.1 | length 186.6
  Top Layer w7: CD11.2@2507.63,568.43 2567.63,568.43 LD4.2@2567.63,525.43 ; LD4.2@2551.63,509.43 LD4.2@2567.63,525.43 ; RD19.1@2612.63,509.43 2567.63,509.43 LD4.2@2567.63,525.43
N13086: CD5.1 RD3.2 RD8.1 UD3.8 | length 201.4
  Top Layer w7: CD5.1@3402.63,609.43 3402.63,610.43 RD8.1@3457.63,610.43 ; RD8.1@3457.63,609.43 RD8.1@3457.63,610.43 ; UD3.8@3517.63,635.43 3517.63,665.43 3458.63,665.43 3458.63,664.43 3457.63,663.43 RD8.1@3457.63,610.43
N13086_2988: CD65.1 RD93.2 RD98.1 UD15.8 | length 201.4
  Top Layer w7: CD65.1@3412.63,3130.43 3412.63,3131.43 RD98.1@3467.63,3131.43 ; RD98.1@3467.63,3130.43 RD98.1@3467.63,3131.43 ; UD15.8@3527.63,3156.43 3527.63,3186.43 3468.63,3186.43 3468.63,3185.43 3467.63,3184.43 RD98.1@3467.63,3131.43
N13086_5382: CD45.1 RD63.2 RD68.1 UD11.8 | length 201.4
  Top Layer w7: CD45.1@3407.63,2675.43 3407.63,2676.43 RD68.1@3462.63,2676.43 ; RD68.1@3462.63,2675.43 RD68.1@3462.63,2676.43 ; UD11.8@3522.63,2701.43 3522.63,2731.43 3463.63,2731.43 3463.63,2730.43 3462.63,2729.43 RD68.1@3462.63,2676.43
N13086_5830: CD25.1 RD33.2 RD38.1 UD7.8 | length 201.4
  Top Layer w7: CD25.1@3402.63,1055.43 3402.63,1056.43 RD38.1@3457.63,1056.43 ; RD38.1@3457.63,1055.43 RD38.1@3457.63,1056.43 ; UD7.8@3517.63,1081.43 3517.63,1111.43 3458.63,1111.43 3458.63,1110.43 3457.63,1109.43 RD38.1@3457.63,1056.43
N18557: CD78.2 RD108.1 RD115.2 UD15.4 | length 406.7
  Top Layer w7: CD78.2@3407.63,3021.43 3407.63,3026.43 3412.63,3026.43 3415.63,3023.43 3465.63,3023.43 3656.63,3023.43 3677.63,3002.43 3677.63,2960.43 3677.63,2939.43 3686.63,2930.43 RD108.1@3732.63,2930.43
N18557_5415: CD58.2 RD78.1 RD85.2 UD11.4 | length 406.7
  Top Layer w7: CD58.2@3402.63,2566.43 3402.63,2571.43 3407.63,2571.43 3410.63,2568.43 3460.63,2568.43 3651.63,2568.43 3672.63,2547.43 3672.63,2505.43 3672.63,2484.43 3681.63,2475.43 RD78.1@3727.63,2475.43
N18557_5863: CD38.2 RD48.1 RD55.2 UD7.4 | length 433.3
  Top Layer w7: CD38.2@3397.63,946.43 3397.63,951.43 3402.63,951.43 3405.63,948.43 3455.63,948.43 3482.63,975.37 3648.58,975.37 3667.63,956.4 3667.63,951.37 ; UD7.4@3667.63,885.43 3667.63,951.37 ; RD48.1@3719.63,986.37 3719.63,985.37 3685.63,951.37 3667.63,951.37
N18557_6311: CD18.2 RD18.1 RD25.2 UD3.4 | length 420.9
  Top Layer w7: CD18.2@3397.63,500.43 3397.63,505.43 3402.63,505.43 3405.63,502.43 3455.63,502.43 3469.2,516 3652.63,516 3666.2,502.43 3667.63,502.43 ; UD3.4@3667.63,439.43 3667.63,502.43 ; RD18.1@3722.63,538.37 3719.63,539.37 3682.63,502.43 3667.63,502.43
N21666: CD65.2 RD98.2 RD103.1 UD15.5 | length 414
  Top Layer w7: CD65.2@3412.63,3074.43 3467.63,3074.43 3467.63,3084.43 3658.63,3084.43 3677.63,3103.43 UD15.5@3677.63,3120 ; UD15.5@3677.63,3156.43 UD15.5@3677.63,3120 ; RD103.1@3733.63,3110 3742.63,3119 3741.63,3120 UD15.5@3677.63,3120
N21666_5417: CD45.2 RD68.2 RD73.1 UD11.5 | length 414.1
  Top Layer w7: CD45.2@3407.63,2619.43 3462.63,2619.43 3462.63,2629.43 3653.63,2629.43 3672.63,2648.43 UD11.5@3672.63,2681.43 ; UD11.5@3672.63,2701.43 UD11.5@3672.63,2681.43 ; RD73.1@3725.63,2666 3734.63,2675 3733.2,2674 3679.63,2674 UD11.5@3672.63,2681.43
N21666_5865: CD25.2 RD38.2 RD43.1 UD7.5 | length 400.1
  Top Layer w7: CD25.2@3402.63,999.43 3457.63,999.43 3461.63,995.37 3659.63,995.37 3667.63,1003.43 UD7.5@3667.63,1040.37 ; UD7.5@3667.63,1081.43 UD7.5@3667.63,1040.37 ; RD43.1@3719.63,1040.37 UD7.5@3667.63,1040.37
N21666_6313: CD5.2 RD8.2 RD13.1 UD3.5 | length 393.1
  Top Layer w7: CD5.2@3402.63,553.43 3457.63,553.43 3466.63,544 3629.7,544 3667.63,582.37 UD3.5@3667.63,604 ; UD3.5@3667.63,635.43 UD3.5@3667.63,604 ; RD13.1@3722.63,604 UD3.5@3667.63,604
N95032: CP15.2 LP4.2 UP7.1 UP7.7 UP7.8 | length 617.4
  Top Layer w7: LP4.2@733.63,201 711.63,179 711.3,179 LP4.2@711.3,155.33 ; v3@797.63,200 v3(798.63,201) ; CP15.2@2024.63,124 CP15.2@2044.63,104 ; v3(2104.63,104) v3@2109.63,99 ; LP4.2@711.3,155.33 736.63,130 LP4.2@711.3,155.33
  Top Layer w20: LP4.2@733.63,201 v3(798.63,201) ; CP15.2@2044.63,104 v3(2104.63,104) ; LP4.2@736.63,130 v3(799.63,130) LP4.2@736.63,130
  Bottom Layer w7: v3(2379.63,104) v3@2380.63,103 ; v3@2575.63,104 v3(2576.63,103)
  Bottom Layer w20: v3(2379.63,104) UP7.1@2454.63,104 ; v3@2575.63,104 2650.63,104 UP7.7@2650.63,154
N156035: RD2.1 RD4.2 UD4.1 | length 266.2
  Top Layer w7: UD4.1@2877.63,629.43 2882.63,634.43 2882.63,665.43 2886.63,669.43 2947.63,669.43 3002.63,614.43 RD4.2@3003.63,614.43
  Top Layer w10: UD4.1@2877.63,629.43 2877.63,707.63 2878,708 v2(2878,712)
N156035_3008: RD92.1 RD94.2 UD16.1 | length 263.3
  Top Layer w7: UD16.1@2884.63,3149 2892.63,3157 2892.63,3186.43 2896.63,3190.43 2957.63,3190.43 3012.63,3135.43 RD94.2@3013.63,3135.43
  Top Layer w10: v2@2884,3225 v2(2883,3224) 2884.63,3222.37 UD16.1@2884.63,3149
N156035_5406: RD62.1 RD64.2 UD12.1 | length 270.4
  Top Layer w7: UD12.1@2879.63,2694 2887.63,2702 2887.63,2731.43 2891.63,2735.43 2952.63,2735.43 3007.63,2680.43 RD64.2@3008.63,2680.43
  Top Layer w10: UD12.1@2879.63,2694 2880,2694.37 2880,2770 2885,2775 v2(2884,2775)
N156035_5854: RD32.1 RD34.2 UD8.1 | length 267.7
  Top Layer w7: UD8.1@2874.63,1074 2882.63,1082 2882.63,1111.43 2886.63,1115.43 2947.63,1115.43 3002.63,1060.43 RD34.2@3003.63,1060.43
  Top Layer w10: UD8.1@2874.63,1074 2873,1075.63 2873,1152 v2(2875,1154)
N156306: RD107.2 RD116.1 UD16.6 | length 335.3
  Top Layer w7: RD116.1@2742.63,2880.43 2746.63,2880.43 2792.63,2926.43 2792.63,2945 2784.63,2953 2784.63,2989 2809.63,3014 2909.63,3014 2953.2,2970.43 RD107.2@2956.63,2970.43
N156306_5416: RD77.2 RD86.1 UD12.6 | length 335.3
  Top Layer w7: RD86.1@2737.63,2425.43 2741.63,2425.43 2787.63,2471.43 2787.63,2490 2779.63,2498 2779.63,2534 2804.63,2559 2904.63,2559 2948.2,2515.43 RD77.2@2951.63,2515.43
N156306_5864: RD47.2 RD56.1 UD8.6 | length 335.3
  Top Layer w7: RD56.1@2732.63,805.43 2736.63,805.43 2782.63,851.43 2782.63,870 2774.63,878 2774.63,914 2799.63,939 2899.63,939 2943.2,895.43 RD47.2@2946.63,895.43
N156306_6312: RD17.2 RD26.1 UD4.6 | length 334.2
  Top Layer w7: RD26.1@2732.63,359.43 2736.63,359.43 2782.63,405.43 2782.63,428.43 2777.63,433.43 2774.63,468 2799.63,493 2899.63,493 2943.2,449.43 RD17.2@2946.63,449.43
N156577: RD22.1 RD26.2 UD4.7 | length 481.2
  Top Layer w7: UD4.7@2827.63,433.43 2827.63,397 2790.07,359.43 2788.63,359.43 2789.63,359.43 2789.63,358 2839.63,308 2954.63,308 2969.63,323 2969.63,372.43 RD22.1@2947.63,394.43
  Top Layer w10: v2(2724,310) 2740,324 2780,324 2788.63,332.63 RD26.2@2788.63,359.43
N156577_3005: RD112.1 RD116.2 UD16.7 | length 453.7
  Top Layer w7: RD116.2@2798.63,2880.43 RD116.2@2799.63,2880.43 ; RD116.2@2799.63,2884 RD116.2@2799.63,2880.43 ; UD16.7@2842.63,2961 2834.63,2953 2842.63,2945 2842.63,2922.43 2800.63,2880.43 RD116.2@2799.63,2880.43 ; RD112.1@2957.63,2915.43 2979.63,2893.43 2979.63,2844 2964.63,2829 2860,2829 2815,2874 2804.63,2874 2799.63,2879 RD116.2@2799.63,2880.43
  Top Layer w10: v2(2791,2831) 2792,2830 2792,2873.8 RD116.2@2798.63,2880.43
N156577_5401: RD82.1 RD86.2 UD12.7 | length 439.6
  Top Layer w7: RD86.2@2793.63,2425.43 RD86.2@2794.63,2425.43 ; UD12.7@2829.63,2498 2837.63,2490 2837.63,2467.43 2795.63,2425.43 RD86.2@2794.63,2425.43 ; RD82.1@2951.63,2461.43 2952.63,2460.43 2974.63,2438.43 2974.63,2389 2959.63,2374 2844.63,2374 2794.63,2424 RD86.2@2794.63,2425.43
  Top Layer w10: v2(2785,2375) 2785,2414 2793.63,2422.63 RD86.2@2793.63,2425.43
N156577_5849: RD52.1 RD56.2 UD8.7 | length 425.9
  Top Layer w7: RD56.2@2788.63,805.43 RD56.2@2789.63,805.43 ; UD8.7@2824.63,878 2824.63,839 2791.07,805.43 RD56.2@2789.63,805.43 ; RD52.1@2947.63,840.43 2969.63,818.43 2969.63,769 2954.63,754 2839.63,754 2789.63,804 RD56.2@2789.63,805.43
  Top Layer w10: v2(2780,762) 2790,772 2790,804.07 RD56.2@2788.63,805.43
N190647: RD99.2 UD16.3 | length 176.9
  Top Layer w7: RD99.2@2678.63,3125.43 2679.63,3125.43 2714.63,3090 2768.63,3090 2792.63,3114.43 2792.63,3141 UD16.3@2784.63,3149
N190647_5413: RD69.2 UD12.3 | length 177.8
  Top Layer w7: RD69.2@2673.63,2670.43 2674.63,2670.43 2710.63,2634 2762.63,2634 2787.63,2659.43 2787.63,2686 UD12.3@2779.63,2694
N190647_5861: RD39.2 UD8.3 | length 177.8
  Top Layer w7: RD39.2@2668.63,1050.43 2669.63,1050.43 2705.63,1014 2757.63,1014 2782.63,1039.43 2782.63,1066 UD8.3@2774.63,1074
N190647_6309: RD9.2 UD4.3 | length 176.8
  Top Layer w7: RD9.2@2668.63,604.43 2669.63,604.43 2704.63,569 2758.07,569 2782.63,594 2782.63,624.43 UD4.3@2777.63,629.43
N190660: RD19.2 UD4.5 | length 116.9
  Top Layer w7: RD19.2@2668.63,509.43 2689.63,509.43 2732.63,466.43 2732.63,438.43 UD4.5@2727.63,433.43
N190660_2989: RD109.2 UD16.5 | length 119.6
  Top Layer w7: RD109.2@2678.63,3030.43 2699.63,3030.43 2742.63,2987.43 2742.63,2961 UD16.5@2734.63,2953
N190660_5384: RD79.2 UD12.5 | length 119.6
  Top Layer w7: RD79.2@2673.63,2575.43 2694.63,2575.43 2737.63,2532.43 2737.63,2506 UD12.5@2729.63,2498
N190660_5832: RD49.2 UD8.5 | length 119.6
  Top Layer w7: RD49.2@2668.63,955.43 2689.63,955.43 2732.63,912.43 2732.63,886 UD8.5@2724.63,878
N190818: CD18.1 RD25.1 RD27.2 UD3.1 | length 235.2
  Top Layer w7: CD18.1@3397.63,444.43 3397.63,449.43 3402.63,449.43 3405.63,446.43 3455.63,446.43 3513.63,446.43 3517.63,442.43 3517.63,439.43 3517.63,402.43 3514.63,399.43 3458.63,399.43 RD27.2@3453.63,394.43
N190818_2985: CD78.1 RD115.1 RD117.2 UD15.1 | length 235.2
  Top Layer w7: CD78.1@3407.63,2965.43 3407.63,2970.43 3412.63,2970.43 3415.63,2967.43 3465.63,2967.43 3523.63,2967.43 3527.63,2963.43 3527.63,2960.43 3527.63,2923.43 3524.63,2920.43 3468.63,2920.43 RD117.2@3463.63,2915.43
N190818_5380: CD58.1 RD85.1 RD87.2 UD11.1 | length 235.2
  Top Layer w7: CD58.1@3402.63,2510.43 3402.63,2515.43 3407.63,2515.43 3410.63,2512.43 3460.63,2512.43 3518.63,2512.43 3522.63,2508.43 3522.63,2505.43 3522.63,2468.43 3519.63,2465.43 3463.63,2465.43 RD87.2@3458.63,2460.43
N190818_5828: CD38.1 RD55.1 RD57.2 UD7.1 | length 235.2
  Top Layer w7: CD38.1@3397.63,890.43 3397.63,895.43 3402.63,895.43 3405.63,892.43 3455.63,892.43 3513.63,892.43 3517.63,888.43 3517.63,885.43 3517.63,848.43 3514.63,845.43 3458.63,845.43 RD57.2@3453.63,840.43
N191405: RA23.2 RA24.1 RA25.1 RA26.1 UA3.3 | length 460.9
  Top Layer w7: RA23.2@3012.63,1919.43 3013.63,1920.43 RA24.1@3057.63,1920.43 ; RA26.1@3057.63,2030.43 3057.63,1975.43 RA24.1@3057.63,1920.43 ; UA3.3@3233.83,1945.43 3233.83,1980.23 3222.63,1991.43 3169.63,1991.43 3161.63,1983.43 3161.63,1946.43 3142.63,1927.43 3142.63,1902.43 3133.63,1893.43 3081.63,1893.43 3057.63,1917.43 RA24.1@3057.63,1920.43
N191965: CP11.2 UP3.3 | length 77
  Bottom Layer w7: UP3.3@2192.63,3337.8 2262.83,3337.8 CP11.2@2267.63,3333
N192118: RP14.2 RP15.1 UP3.2 | length 201
  Bottom Layer w7: UP3.2@2192.63,3363.4 2241.23,3363.4 2244.63,3360 2296.63,3360 2324.63,3332 2324.63,3331 RP15.1@2379.63,3331
N192153: CP13.1 LP3.2 RP16.1 UP3.8 | length 504.5
  Top Layer w7: LP3.2@756.3,3394 756.3,3435.67 794.63,3474 v2(869.63,3474)
  Top Layer w20: CP13.1@1619.63,3504 v2(1694.63,3504) CP13.1@1619.63,3504
  Bottom Layer w7: RP16.1@1999.73,3446.1 RP16.1@2002.63,3449
  Bottom Layer w20: v2(1933.63,3504) 2000,3504 2000,3451.63 RP16.1@2002.63,3449 ; UP3.8@1999.73,3389 RP16.1@1999.73,3446.1
  other v1: 2001,3502
  other v2: 868.63,3554
N192759: CP3.2 RP3.2 UP1.5 UP2.5 UP3.5 UP7.6 | length 6723.9
  Top Layer w7: RP3.2@1094.63,1270 1094.63,1381 1112.63,1399 v1(1227.63,1399) ; UP2.5@2139.73,1500.75 2140.63,1501.65 v1(2140.63,1545)
  Mid-Layer 1 w7: v1(1227.63,1399) 1227.63,561.93 1221.13,555.43 1221.13,520.43 1227.63,513.93 1227.63,183.93 1273.63,137.93 2509.57,137.93 v1(2556.63,185)
  Mid-Layer 2 w7: v1(2050.63,3281) 1687.63,3281 1664.63,3304 1589.63,3304 1194.63,2909 1194.63,1434 1229.63,1399 v1(1227.63,1399) 1228.63,1398 1476.63,1398 1607,1528.37 2124,1528.37 v1(2140.63,1545)
  Bottom Layer w7: v1(1227.63,1399) 1254.38,1372.25 1296.73,1372.25 1296.73,1341.9 CP3.2@1316.63,1322 ; v1(2556.63,185) 2556.63,187 2557.63,188 2583.63,188 2599.63,204 UP7.6@2650.63,204
  Bottom Layer w15: UP3.5@1999.73,3312.25 2026.75,3312.25 2050.63,3288.37 v1(2050.63,3281)
N193110: CP6.1 LP1.2 RP7.1 UP1.8 | length 578.5
  Top Layer w7: v2@658.63,1806 v2(659.63,1805) ; LP1.2@715.63,1806 746.3,1775.33 LP1.2@746.3,1769.67 ; LP1.2@746.3,1748.37 LP1.2@746.3,1769.67 ; v1(1296.63,1482) 1309.63,1495 CP6.1@1309.63,1599 ; LP1.2@746.3,1769.67 780.63,1804 LP1.2@746.3,1769.67
  Top Layer w20: v2@658.63,1806 LP1.2@715.63,1806 ; LP1.2@780.63,1804 v2(839.63,1804) LP1.2@780.63,1804
  Bottom Layer w7: UP1.8@1296.73,1449 1296.73,1481.9 v1(1296.63,1482) 1323.63,1509 RP7.1@1364.63,1509
N193130: RP5.2 RP6.1 UP1.2 | length 115.4
  Bottom Layer w7: UP1.2@1489.63,1423.4 1527.03,1423.4 RP6.1@1554.63,1451 ; RP6.1@1554.63,1449 RP6.1@1554.63,1451 ; RP5.2@1554.63,1488 RP6.1@1554.63,1451
N195694: RA17.1 UA3.9 | length 43.2
  Top Layer w7: UA3.9@3361.77,2179.68 3367.52,2185.43 RA17.1@3402.63,2185.43
N195704: RA27.1 UA3.7 | length 160.1
  Top Layer w7: UA3.7@3336.23,1945.43 3336.23,1989.03 3342.63,1995.43 3372.63,1995.43 3402.63,1965.43 RA27.1@3402.63,1930.43
N195714: RA12.2 RA14.2 RA15.2 RA16.2 UA3.13 | length 526
  Top Layer w7: RA12.2@3012.63,2195.43 3052.63,2195.43 RA15.2@3056.63,2191.43 ; RA14.2@3056.63,2085.43 3056.63,2140.43 RA15.2@3056.63,2191.43 ; RA15.2@3056.63,2195.43 RA15.2@3056.63,2193.43 ; UA3.13@3259.4,2179.68 3259.4,2137.2 3220.63,2098.43 3185.63,2098.43 3178.63,2105.43 3178.63,2124.43 3162.63,2140.43 3162.63,2199.43 3139.63,2222.43 3085.63,2222.43 RA15.2@3056.63,2193.43 ; RA15.2@3056.63,2191.43 RA15.2@3056.63,2193.43
N195717: RD92.2 RD95.2 RD96.2 RD97.2 UD14.13 | length 520.6
  Top Layer w7: RD92.2@3013.63,3190.43 RD95.2@3056.63,3190.43 ; RD97.2@3056.63,3080.43 3056.63,3135.43 RD95.2@3056.63,3190.43 ; UD14.13@3259.38,3174.02 3259.38,3129.18 3221.63,3091.43 3192.63,3091.43 3161.63,3122.43 3161.63,3192.43 3136.63,3217.43 3083.63,3217.43 RD95.2@3056.63,3190.43
N195717_5425: RD62.2 RD65.2 RD66.2 RD67.2 UD10.13 | length 520.6
  Top Layer w7: RD62.2@3008.63,2735.43 RD65.2@3051.63,2735.43 ; RD67.2@3051.63,2625.43 3051.63,2680.43 RD65.2@3051.63,2735.43 ; UD10.13@3254.38,2719.02 3254.38,2674.18 3216.63,2636.43 3187.63,2636.43 3156.63,2667.43 3156.63,2737.43 3131.63,2762.43 3078.63,2762.43 RD65.2@3051.63,2735.43
N195717_5873: RD32.2 RD35.2 RD36.2 RD37.2 UD6.13 | length 520.6
  Top Layer w7: RD32.2@3003.63,1115.43 RD35.2@3046.63,1115.43 ; RD37.2@3046.63,1005.43 3046.63,1060.43 RD35.2@3046.63,1115.43 ; UD6.13@3249.38,1099.02 3249.38,1054.18 3211.63,1016.43 3182.63,1016.43 3151.63,1047.43 3151.63,1117.43 3126.63,1142.43 3073.63,1142.43 RD35.2@3046.63,1115.43
N195717_6321: RD2.2 RD5.2 RD6.2 RD7.2 UD2.13 | length 520.6
  Top Layer w7: RD2.2@3003.63,669.43 RD5.2@3046.63,669.43 ; RD7.2@3046.63,559.43 3046.63,614.43 RD5.2@3046.63,669.43 ; UD2.13@3249.38,653.02 3249.38,608.18 3211.63,570.43 3182.63,570.43 3151.63,601.43 3151.63,671.43 3126.63,696.43 3073.63,696.43 RD5.2@3046.63,669.43
N195917: RA11.1 RA19.2 UA2.4 | length 418.9
  Top Layer w7: RA19.2@2737.63,2091.43 2769.63,2091.43 2792.63,2114.43 UA2.4@2792.63,2115.43 ; v2(2747,2181) 2777.57,2150.43 2792.63,2150.43 UA2.4@2792.63,2115.43 ; RA11.1@3021.63,2040.43 3012.63,2040.43 2988.63,2040.43 2936.63,2092.43 2815.63,2092.43 UA2.4@2792.63,2115.43
N195920: RA11.2 RA12.1 UA2.1 | length 117.6
  Top Layer w7: UA2.1@2942.63,2150.43 2953.63,2139.43 3012.63,2139.43 RA11.2@3012.63,2096.43
N195926: RA22.2 RA23.1 UA2.8 | length 163.1
  Top Layer w7: UA2.8@2942.63,1954.43 UA2.8@2943.63,1953.43 ; RA22.2@2943.63,1880.43 UA2.8@2943.63,1953.43 ; RA23.1@3012.63,1975.43 2947.63,1975.43 2943.63,1971.43 UA2.8@2943.63,1953.43
N195932: RA21.2 RA22.1 UA2.5 | length 229.3
  Top Layer w7: v2(2782,2039) 2792.63,2028.37 2792.63,1954.43 2792.63,1929.43 2841.63,1880.43 2843.63,1880.43 RA22.1@2887.63,1880.43
N195968: CA1.1 UA1.20 UA2.2 UA4.2 | length 2117.8
  Top Layer w7: UA1.20@2037.72,2087.85 2037.72,2121.82 2214.34,2298.43 2592.63,2298.43 2632.63,2258.43 2632.63,2255.43 2644.63,2267.43 2648.07,2267.43 2678.07,2297.43 2966.63,2297.43 2977.63,2286.43 ; UA2.2@2892.63,2150.43 2892.63,2195.43 2906.63,2209.43 2941.63,2209.43 2966.63,2234.43 2966.63,2275.43 2977.63,2286.43 ; UA4.2@3617.63,2165.43 3617.63,2198.43 3650.63,2231.43 3650.63,2278 3600.2,2328.43 3019.63,2328.43 2977.63,2286.43
N196007: CA11.2 CA12.2 CA13.2 UA1.13 UA1.14 | length 247.2
  Top Layer w7: UA1.13@2123.35,2002.22 2144.27,2002.22 2144.27,2021.91 ; UA1.14@2123.35,2021.91 2144.27,2021.91 ; CA12.2@2201.73,2021.91 2144.27,2021.91 ; CA12.2@2201.77,2021.87 CA13.2@2265.2,2021.87 ; CA13.2@2269.63,2017.43 2271.63,2015.43 CA11.2@2333.63,2015.43
N196017: CA12.1 CA13.1 CA14.2 UA1.11 UA1.12 | length 278.1
  Top Layer w7: UA1.11@2123.35,1962.85 2144.27,1962.85 ; UA1.12@2123.35,1982.54 2144.27,1982.54 2144.27,1962.85 ; CA14.2@2333.63,1935.43 2331.63,1933.43 2269.63,1933.43 2214.2,1933.43 2201.77,1945.87 2201.77,1965.87 2147.29,1965.87 2144.27,1962.85
N196076: CA20.1 CA21.1 CA22.2 UA1.3 UA1.4 | length 275.2
  Top Layer w7: UA1.3@2123.35,1805.37 2144.27,1805.37 ; UA1.4@2123.35,1825.06 2144.27,1825.06 2144.27,1805.37 ; CA22.2@2332.63,1775.43 2267.63,1775.43 2209.7,1775.43 2201.73,1783.41 2201.73,1805.37 2144.27,1805.37
N196084: CA19.2 CA20.2 CA21.2 UA1.5 UA1.6 | length 252.3
  Top Layer w7: UA1.5@2123.35,1844.74 2144.27,1844.74 2144.27,1864.43 ; UA1.6@2123.35,1864.43 2144.27,1864.43 ; CA21.2@2264.63,1856.43 2267.63,1859.43 2328.63,1859.43 CA19.2@2330.63,1857.43 ; CA21.2@2265.7,1861.37 2201.73,1861.37 2147.32,1861.37 2144.27,1864.43
N196646: RA1.2 RA2.2 UA1.21 | length 176.4
  Top Layer w7: RA2.2@1985.77,2208.37 v4(1985.77,2165.87) 1985.77,2151.87 2018.03,2119.6 UA1.21@2018.03,2087.85
  Bottom Layer w7: v4(1985.77,2165.87) RA1.2@1985.77,2208.37
N196910: RP26.2 RP30.2 UP5.10 | length 370.5
  Top Layer w7: UP5.10@1909.48,1480.05 1909.48,1448.15 1932.63,1425 1932.63,1356.13 1952.63,1336 2071,1336 2095.63,1311.37 2096.63,1310.37 RP30.2@2150.63,1310.37
N197030: RD94.1 RD102.1 UD16.2 | length 223.7
  Top Layer w7: UD16.2@2834.63,3149 2842.63,3141 2842.63,3111.43 2873.63,3080.43 2957.63,3080.43 RD94.1@2957.63,3135.43
N197030_5448: RD64.1 RD72.1 UD12.2 | length 229.8
  Top Layer w7: UD12.2@2829.63,2694 2829.63,2654 2858.2,2625.43 2952.63,2625.43 RD64.1@2952.63,2680.43
N197030_5896: RD34.1 RD42.1 UD8.2 | length 229.2
  Top Layer w7: UD8.2@2824.63,1074 2824.63,1035 2854.2,1005.43 2947.63,1005.43 RD34.1@2947.63,1060.43